# Altium PCB WIZ750SR.PcbDoc (part 2 of 2)
Units mm, origin at the board's own origin, x right, y up, seen from the top; angles counter-clockwise.
Board outline 45 x 30 mm, 4 copper layers (Top Layer, Internal Plane 1, Internal Plane 2, Bottom Layer); 93 components, 69 nets, 325 pads, 127 vias.
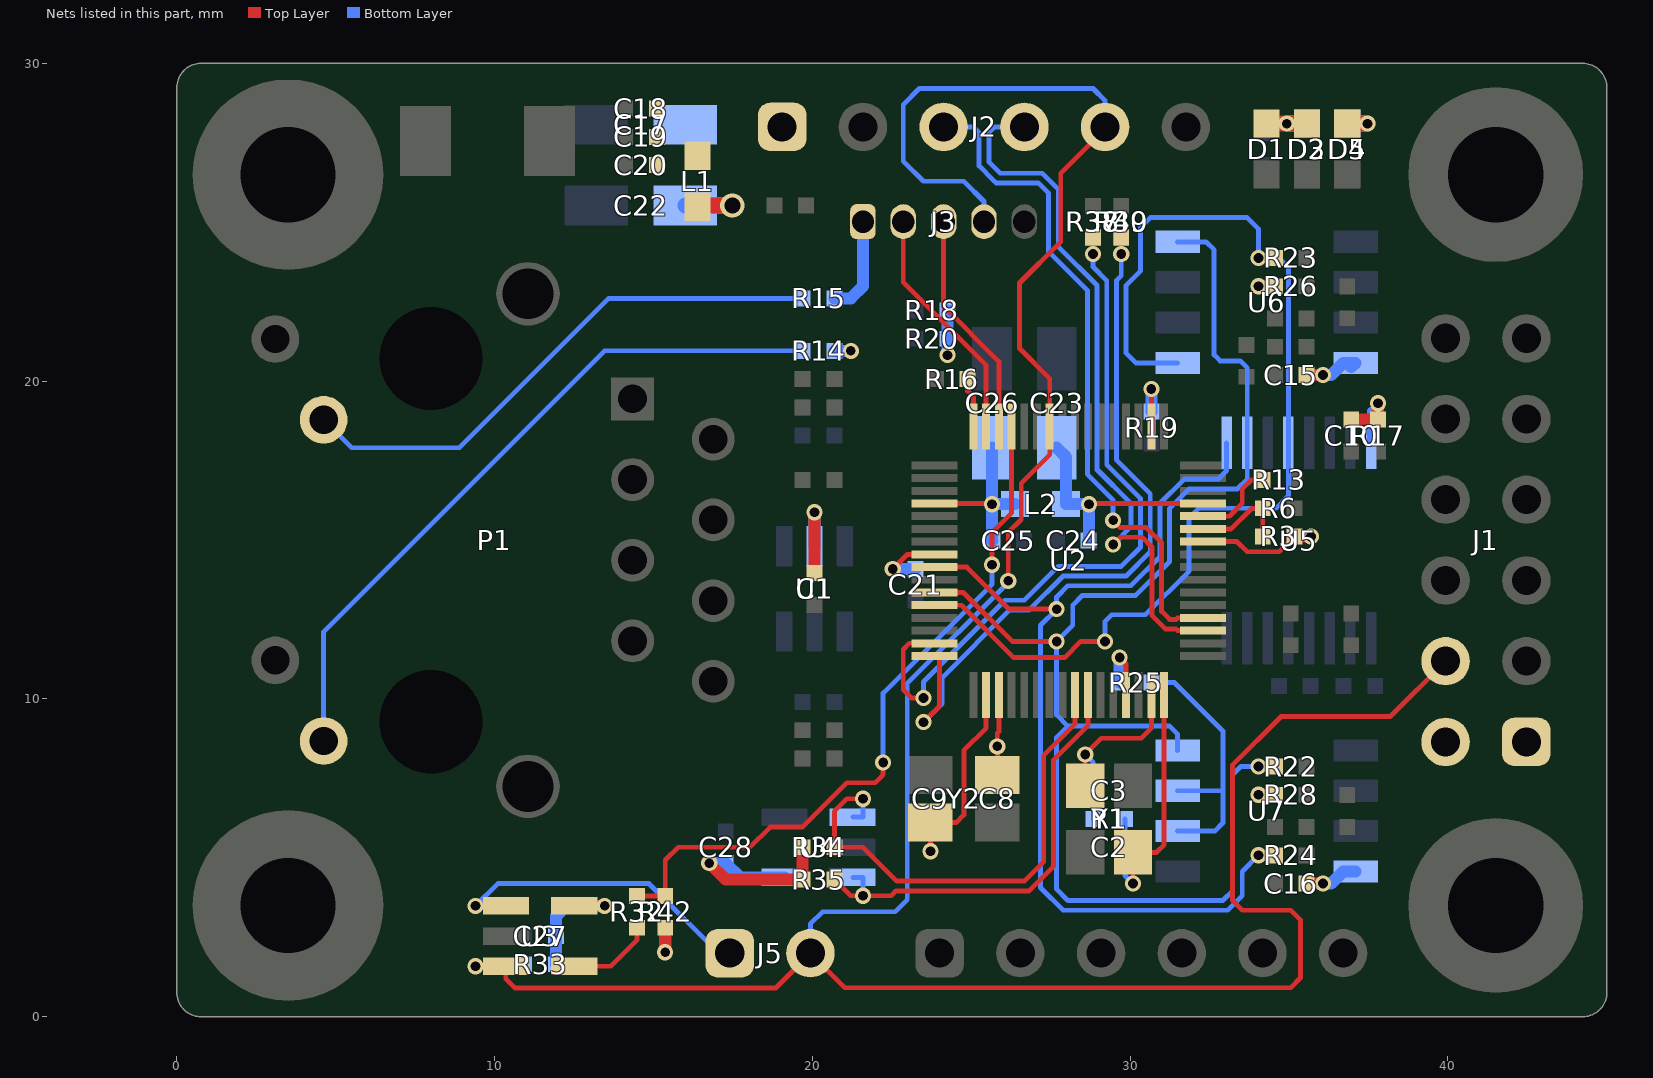
[diagram p4: the nets of this part, all layers, seen from the top]

## Via types
v1: diameter 0.508, hole 0.305, Top Layer to Bottom Layer, tented both sides, 92 vias
v2: diameter 0.762, hole 0.508, Top Layer to Bottom Layer, tented both sides, 35 vias

## Nets (pads, with @x,y where several pads share a name; then routed paths per layer and width w, separated by ;. In a path a pad name is that pad's centre, name@x,y a point inside that pad or via, vN(x,y) a via of type N, cw(c..) or ccw(c..) an arc to the next point about the centre after c; other vN are vias at no path point) (continued)
NetJ5_1: J5.1 U3.1 | length 10.2
  Top Layer w0.152: v1(9.398,3.49) U3.1@10.355,3.49
  Bottom Layer w0.152: v1(9.398,3.49) 10.099,4.191 14.224,4.191 14.859,4.191 17.05,2 J5.1@17.399,2
NetP1_L1: P1.L1 R14.2 | length 22.2
  Bottom Layer w0.152: P1.L1@4.62,8.675 4.62,12.113 13.462,20.955 R14.2@19.693,20.955
NetP1_L3: P1.L3 R15.2 | length 17.4
  Bottom Layer w0.152: P1.L3@4.62,18.785 5.498,17.907 8.89,17.907 13.589,22.606 R15.2@19.693,22.606
NetR13_2: R13.2 U2.12 | length 2.6
  Top Layer w0.152: U2.12@32.292,15.751 33.125,15.751 33.528,16.154 33.528,16.612 33.807,16.891 R13.2@34.171,16.891
NetR16_2: R16.2 U2.32 | length 1.6
  Top Layer w0.152: R16.2@24.884,20.066 24.884,19.693 25.067,19.51 U2.32@25.067,18.576
NetR25_1: R25.1 U7.2 U7.3 | length 8.7
  Bottom Layer w0.152: R25.1@30.675,10.516 31.394,10.516 32.918,8.992 32.918,7.112 ; U7.2@31.49,5.842 32.664,5.842 32.918,6.096 32.918,7.112 ; U7.3@31.49,7.112 32.918,7.112
NetR32_2: R32.2 U3.4 | length 2.9
  Top Layer w0.152: U3.4@12.645,1.45 U3.4@12.505,1.59 13.655,1.59 14.478,2.413 R32.2@14.478,2.802
REGIN: C23.1 C24.2 L2.1 U2.13 | length 7.4
  Top Layer w0.152: v1(28.702,16.129) 28.702,16.151 U2.13@32.292,16.151
  Bottom Layer w0.381: C23.1@27.686,17.904 27.978,17.612 L2.1@27.978,16.129 v1(28.702,16.129) 28.702,14.994 C24.2@28.694,14.986
REGOUT: C25.2 C26.1 L2.2 U2.36 | length 5.5
  Top Layer w0.152: U2.36@23.842,16.151 25.632,16.151 v1(25.654,16.129)
  Bottom Layer w0.381: C26.1@25.654,17.904 v1(25.654,16.129) ; C25.2@25.662,14.986 25.654,14.994 v1(25.654,16.129) ; L2.2@26.378,16.129 v1(25.654,16.129)
"RS232/485 SELECT PIN": R3.1 R6.2 U2.11 | length 3
  Top Layer w0.152: U2.11@32.292,15.351 33.182,15.351 33.833,16.002 R6.2@34.171,16.002 R3.1@34.171,15.113
RSTN: J1.4 J2.5 J3.4 J5.2 R33.1 U2.26 U3.3 | length 90.6
  Top Layer w0.152: v1(9.398,1.59) U3.3@10.355,1.59 10.35,1.585 10.35,1.2 10.65,0.9 18.839,0.9 J5.2@19.939,2 21.025,0.914 35.052,0.914 35.357,1.219 35.357,3.048 35.052,3.353 33.528,3.353 33.223,3.658 33.223,7.925 34.747,9.449 38.185,9.449 J1.4@39.926,11.19 ; v1(26.162,13.716) 26.162,15.24 26.569,15.647 26.569,16.79 27.467,17.688 U2.26@27.467,18.576 27.467,20.082 26.518,21.031 26.518,23.089 27.813,24.384 27.813,26.543 29.21,27.94 J2.5@29.21,28
  Bottom Layer w0.152: v1(9.398,1.59) 10.869,1.59 R33.1@10.93,1.651 ; J5.2@19.939,2 19.939,2.921 20.32,3.302 22.606,3.302 22.987,3.683 22.987,10.49 26.162,13.665 v1(26.162,13.716) ; J3.4@25.4,25.019 25.4,25.654 24.765,26.289 23.495,26.289 22.86,26.924 22.86,28.702 23.368,29.21 28.829,29.21 29.21,28.829 J2.5@29.21,28
RXD_RO: R23.2 U2.44 U5.12 U6.1 | length 34.8
  Top Layer w0.152: U2.44@23.842,12.951 24.692,12.951 26.34,11.303 27.94,11.303 28.448,11.811 v1(29.21,11.811) ; v1(34.036,23.876) R23.2@34.552,23.876
  Bottom Layer w0.152: v1(29.21,11.811) 29.21,12.446 29.413,12.649 30.48,12.649 31.852,14.021 31.852,15.697 32.156,16.002 34.595,16.002 34.981,16.388 U5.12@34.981,18.06 34.981,23.566 34.671,23.876 v1(34.036,23.876) 34.036,24.79 33.68,25.146 30.632,25.146 30.328,24.841 30.328,23.47 29.87,23.012 29.87,20.879 30.175,20.574 U6.1@31.49,20.574
SCL1: R34.1 U2.57 U4.1 | length 16
  Top Layer w0.152: v1(21.59,6.858) 21.082,6.858 20.693,6.469 R34.1@20.693,5.334 21.59,5.334 22.657,4.267 26.67,4.267 27.28,4.877 27.28,8.23 28.267,9.217 U2.57@28.267,10.126
  Bottom Layer w0.152: U4.1@21.268,6.284 21.59,6.284 v1(21.59,6.858)
SDA1: R35.1 U2.58 U4.3 | length 14.3
  Top Layer w0.152: R35.1@20.759,4.384 R35.1@20.693,4.318 21.201,3.81 v1(21.59,3.81) 22.479,3.81 22.631,3.962 26.822,3.962 27.584,4.724 27.584,8.077 28.667,9.16 U2.58@28.667,10.126
  Bottom Layer w0.152: U4.3@21.268,4.384 21.59,4.384 v1(21.59,3.81)
STATUS_LED0: R37.2 R38.2 U2.47 | length 23
  Top Layer w0.152: v1(23.495,10.033) 23.114,10.033 22.86,10.287 22.86,11.557 23.054,11.751 U2.47@23.842,11.751 ; v1(28.829,24.003) R37.2@28.829,24.519
  Bottom Layer w0.152: v1(23.495,10.033) 23.495,10.541 26.06,13.106 26.67,13.106 27.737,14.173 29.718,14.173 30.328,14.783 30.328,16.307 29.261,17.374 29.261,23.165 28.829,23.597 v1(28.829,24.003) R38.2@28.829,24.519
STATUS_LED1: R39.2 R40.2 U2.48 | length 23.2
  Top Layer w0.152: v1(23.495,9.271) 24.003,9.779 24.003,11.351 U2.48@23.842,11.351 ; v1(29.718,24.003) R39.2@29.718,24.519
  Bottom Layer w0.152: v1(23.495,9.271) 24.079,9.855 24.079,10.668 26.213,12.802 26.822,12.802 27.889,13.868 29.87,13.868 30.632,14.63 30.632,16.459 29.566,17.526 29.566,23.165 29.718,23.317 v1(29.718,24.003) R40.2@29.718,24.519
SWCLK: J3.3 U2.30 | length 7.2
  Top Layer w0.152: J3.3@24.13,25.019 24.13,22.352 25.867,20.615 U2.30@25.867,18.576
SWDIO: J3.2 U2.31 | length 7.5
  Top Layer w0.152: J3.2@22.86,25.019 22.86,23.114 25.467,20.507 U2.31@25.467,18.576
TXD_DI: R22.2 U2.43 U5.10 U6.4 U7.4 | length 46.3
  Top Layer w0.152: U2.43@23.842,13.351 24.749,13.351 26.289,11.811 v1(27.686,11.811) ; v1(34.036,7.874) R22.2@34.552,7.874
  Bottom Layer w0.152: U7.4@31.49,8.382 31.49,8.896 31.242,9.144 28.042,9.144 ; U6.4@31.49,24.384 32.385,24.384 32.639,24.13 32.639,20.828 32.829,20.637 33.465,20.637 33.681,20.421 U5.10@33.681,18.06 33.681,16.917 33.376,16.612 31.852,16.612 31.242,16.002 31.242,14.326 30.175,13.259 28.499,13.259 28.194,12.954 28.194,12.319 v1(27.686,11.811) 27.686,9.5 28.042,9.144 ; v1(34.036,7.874) 33.477,7.874 33.223,7.62 33.223,3.962 32.918,3.658 28.042,3.658 27.686,4.013 27.686,8.788 28.042,9.144
U_CTS0: R24.2 U2.41 U5.9 | length 31.4
  Top Layer w0.152: U2.41@23.842,14.151 24.863,14.151 26.187,12.827 v1(27.686,12.827) ; v1(34.036,5.08) R24.2@34.552,5.08
  Bottom Layer w0.152: U5.9@33.031,18.06 33.031,17.181 32.766,16.916 31.699,16.916 30.937,16.154 30.937,14.478 30.023,13.564 28.042,13.564 27.686,13.208 v1(27.686,12.827) 27.178,12.319 27.178,4.064 27.889,3.353 33.071,3.353 33.528,3.81 33.528,4.572 v1(34.036,5.08)
U_RXD2: J2.3 U2.4 | length 21.3
  Top Layer w0.152: v1(29.464,15.621) 29.693,15.392 30.505,15.392 30.988,14.909 30.988,12.757 31.242,12.503 31.443,12.503 31.491,12.551 U2.4@32.292,12.551
  Bottom Layer w0.152: J2.3@24.13,28 25.061,28 25.248,27.813 25.248,26.772 25.692,26.327 25.782,26.238 27.102,26.238 27.432,25.908 27.432,24.079 28.651,22.86 28.651,17.069 29.464,16.256 v1(29.464,15.621)
U_TXD2: J2.4 U2.3 | length 22.4
  Top Layer w0.152: v1(29.464,14.859) 29.693,15.088 30.378,15.088 30.683,14.783 30.683,12.631 31.116,12.199 31.443,12.199 31.491,12.151 U2.3@32.292,12.151
  Bottom Layer w0.152: J2.4@26.67,28 25.739,28 25.552,27.813 25.552,26.899 25.908,26.543 27.228,26.543 27.737,26.034 27.737,24.232 28.956,23.012 28.956,17.221 30.023,16.154 30.023,15.418 v1(29.464,14.859)
VDD_3.3A: C21.2 C22.1 L1.2 U2.40 | length 4.8
  Top Layer w0.152: v1(22.53,14.089) 22.992,14.551 U2.40@23.842,14.551
  Top Layer w0.508: L1.2@16.383,25.489 16.421,25.527 v2(17.481,25.527)
  Bottom Layer w0.381: v1(22.53,14.089) C21.2@23.241,14.089
  Bottom Layer w0.508: C22.1@16.005,25.527 v2(17.481,25.527)
VDD_3.3V: C1.2 C10.2 C15.2 C16.2 C17.1 C18.2 C19.2 C20.2 C27.2 C28.2 D1.1 D2.1 D3.1 D4.1 D5.1 J1.1 J1.2 J2.1 J3.1 L1.1 R3.2 R14.1 R15.1 R17.1 R18.2 R19.2 R20.2 R25.2 R26.1 R28.1 R33.2 R34.2 R35.2 R42.1 U1.5 U2.10 U2.18 U2.61 U3.5 U4.4 U5.16 U6.8 U7.8 | length 37.4
  Top Layer w0.152: v1(29.667,11.303) 29.867,11.103 U2.61@29.867,10.126 ; U2.18@30.667,18.576 v1(30.667,19.753) ; U2.10@32.292,14.951 33.36,14.951 33.68,14.63 34.688,14.63 R3.2@35.171,15.113
  Top Layer w0.381: U3.5@12.505,3.49 v1(13.462,3.49) ; v1(15.367,2.032) 15.371,2.036 R42.1@15.371,2.802 ; v1(16.756,4.834) 17.272,4.318 R35.2@19.693,4.318 R34.2@19.693,5.334 ; C1.2@20.066,13.962 v1(20.066,15.875) ; v1(34.036,6.985) R28.1@34.552,6.985 ; v1(34.036,22.987) R26.1@34.552,22.987 ; R3.2@35.171,15.113 v1(35.687,15.113) ; C16.2@35.552,4.191 v1(36.068,4.191) ; C15.2@35.552,20.193 v1(36.068,20.193) ; C10.2@36.957,18.788 R17.1@37.795,18.788 v1(37.795,19.304)
  Top Layer w0.508: D1.1@34.29,28.105 v1(34.925,28.105) D2.1@35.56,28.105 ; D4.1@36.83,28.105 v1(37.465,28.105)
  Bottom Layer w0.254: U5.16@37.581,18.06 37.581,19.061
  Bottom Layer w0.381: R33.2@11.93,1.651 C27.2@11.93,2.54 11.93,3.167 12.253,3.49 v1(13.462,3.49) ; v1(16.756,4.834) C28.2@17.272,4.834 17.722,4.384 U4.4@19.118,4.384 ; U1.5@20.066,14.802 v1(20.066,15.875) ; R14.1@20.693,20.955 v1(21.209,20.955) ; R15.1@20.693,22.606 21.209,22.606 21.59,22.987 J3.1@21.59,25.019 ; v1(24.249,20.82) R20.2@24.249,21.336 R18.2@24.249,22.225 ; R25.2@29.667,10.524 v1(29.667,11.303) ; R19.2@30.67,19.042 v1@30.67,19.75 ; v1(36.068,4.191) 36.322,4.191 36.703,4.572 U7.8@37.09,4.572 ; v1(36.068,20.193) 36.322,20.193 36.703,20.574 U6.8@37.09,20.574 U6.8@36.957,20.441
  Bottom Layer w0.508: v1(34.925,28.105) D3.1@35.56,28.105 ; D5.1@36.83,28.105 v1(37.465,28.105)
WDI: R32.1 R42.2 U2.29 | length 22.6
  Top Layer w0.152: R32.1@14.478,3.802 R42.2@15.371,3.802 15.371,4.933 15.772,5.334 18.034,5.334 18.669,5.969 19.685,5.969 21.082,7.366 21.971,7.366 22.225,7.62 v1(22.225,8.001) ; v1(25.654,14.224) 25.654,15.24 26.267,15.853 U2.29@26.267,18.576
  Bottom Layer w0.152: v1(22.225,8.001) 22.225,10.185 25.654,13.614 v1(25.654,14.224)
X1: C9.2 U2.50 Y2.3 | length 7.3
  Top Layer w0.152: v1(23.715,5.207) Y2.3@23.715,6.108 24.523,6.108 24.765,6.35 24.765,8.382 25.467,9.084 U2.50@25.467,10.126
  Bottom Layer w0.152: v1(23.715,5.207) C9.2@23.715,6.358
X2: C8.2 U2.51 Y2.1 | length 3.7
  Top Layer w0.152: Y2.1@25.815,7.608 v1(25.815,8.509) 25.815,8.924 25.867,8.976 U2.51@25.867,10.126
  Bottom Layer w0.152: C8.2@25.815,7.358 v1(25.815,8.509)
XIN: C3.2 R1.2 U2.63 Y1.3 | length 6.6
  Top Layer w0.152: Y1.3@28.587,7.273 v1(28.587,8.255) 29.095,8.763 30.353,8.763 30.667,9.077 U2.63@30.667,10.126
  Bottom Layer w0.152: v1(28.587,8.255) 28.837,8.005 C3.2@28.837,7.112 R1.2@28.837,6.223
XOUT: C2.2 R1.1 U2.64 Y1.1 | length 8.9
  Top Layer w0.152: v1(30.087,4.191) Y1.1@30.087,5.173 30.827,5.173 31.067,5.413 U2.64@31.067,10.126
  Bottom Layer w0.152: R1.1@29.837,6.223 C2.2@29.837,5.334 29.837,4.441 v1(30.087,4.191)
pads on no net: P1. P1.R4 P1.R5 P1.R6 U2.8 U2.19 U2.20 U2.21 U2.22 U2.27 U2.45 U2.46 U2.53 U2.54 U2.55 U2.56 U2.59 U2.60 U7.1
copper on no net:
  other v2: 41.5,1.417 40.027,2.027 42.973,2.027 39.417,3.5 43.583,3.5 40.027,4.973 42.973,4.973 41.5,5.583 41.5,24.417 40.027,25.027 42.973,25.027 39.417,26.5 43.583,26.5 40.027,27.973 42.973,27.973 41.5,28.583

## Polygon pours and split planes (outlines as drawn)
VDD_3.3V on Top Layer "Top Layer-net" (solid, remove dead copper, pour order 2): 14.859,26.543 19.812,26.543 20.066,26.797 20.066,29.21 19.812,29.464 19.05,29.464 15.113,29.464 14.859,29.21 14.859,26.543
CH_GND on Top Layer "Top Layer-net" (solid, remove dead copper, pour order 12): 0.762,29.591 0.381,29.21 0.381,27.432 0.381,0.762 0.762,0.381 2.413,0.381 6.198,0.381 6.604,0.787 6.604,1.143 6.604,5.588 6.985,5.969 8.128,5.969 11.938,5.969 12.192,6.223 12.192,23.749 11.938,24.003 9.017,24.003 8.636,24.384 8.636,29.058 8.103,29.591
GND on Top Layer "Top Layer-gnd" (solid, remove dead copper, pour order 16): 11.176,29.591 10.922,29.337 10.922,28.448 10.922,25.527 11.176,25.273 11.811,25.273 12.827,25.273 13.462,24.638 14.605,23.495 18.288,23.495 19.177,23.495 19.431,23.241 19.431,22.987 19.431,6.731 19.177,6.477 18.415,6.477 14.605,6.477 12.954,4.826 8.763,4.826 8.509,4.572 8.509,4.318 8.509,0.635 8.763,0.381 9.652,0.381 37.211,0.381 37.465,0.635 37.465,0.889 37.465,5.461 39.243,7.239 39.624,7.62 42.799,7.62 44.323,7.62 44.577,7.874 44.577,8.509 44.577,22.098 44.323,22.352 44.069,22.352 39.624,22.352 37.465,24.511 37.465,28.575 37.465,29.337 37.211,29.591
GND on Bottom Layer "Top Layer-gnd" (solid, remove dead copper, pour order 22): 11.049,29.464 10.922,29.337 10.922,28.448 10.922,25.527 11.176,25.273 11.811,25.273 12.827,25.273 13.462,24.638 14.605,23.495 18.288,23.495 19.177,23.495 19.431,23.241 19.431,22.987 19.431,6.731 19.177,6.477 18.415,6.477 14.605,6.477 12.827,4.699 8.636,4.699 8.509,4.572 8.509,4.318 8.509,0.635 8.763,0.381 9.652,0.381 37.211,0.381 37.465,0.635 37.465,0.889 37.465,5.461 39.243,7.239 39.624,7.62 42.799,7.62 44.323,7.62 44.577,7.874 44.577,8.509 44.577,22.098 44.323,22.352 44.069,22.352 39.624,22.352 37.465,24.511 37.465,28.575 37.465,29.337 37.338,29.464
CH_GND on Bottom Layer "Top Layer-net" (solid, remove dead copper, pour order 20): 0.762,29.591 0.381,29.21 0.381,27.432 0.381,0.762 0.762,0.381 2.413,0.381 6.198,0.381 6.604,0.787 6.604,1.143 6.604,5.588 6.985,5.969 8.128,5.969 11.938,5.969 12.192,6.223 12.192,23.749 11.938,24.003 9.017,24.003 8.636,24.384 8.636,29.058 8.103,29.591
VDD_3.3V on Bottom Layer "Top Layer-net" (solid, remove dead copper, pour order 6): 16.256,28.829 15.113,28.829 14.859,28.575 14.859,27.559 14.859,27.305 15.113,27.051 16.002,27.051 19.812,27.051 20.066,27.305 20.066,28.575 19.812,28.829
GND on Internal Plane 1 (split plane): 44.304,29.483 44.365,29.458 44.417,29.417 44.458,29.365 44.483,29.304 44.49,29.247 44.49,29.238 44.49,24.044 44.133,23.687 40.212,23.687 38.673,25.226 38.673,29.207 38.956,29.49 44.238,29.49 44.247,29.49
CH_GND on Internal Plane 1 (split plane): 44.49,6.157 44.49,0.762 44.49,0.753 44.483,0.696 44.458,0.635 44.417,0.583 44.365,0.542 44.304,0.517 44.247,0.51 44.238,0.51 38.953,0.51 38.673,0.791 38.673,4.746 40.339,6.412 44.235,6.412
GND on Internal Plane 1 (split plane): 38.289,29.209 38.289,25.146 38.295,25.096 38.307,25.069 38.315,25.05 38.345,25.01 39.996,23.359 40.036,23.329 40.082,23.309 40.132,23.303 44.133,23.303 44.49,22.946 44.49,7.051 44.235,6.796 40.259,6.796 40.209,6.79 40.163,6.77 40.123,6.74 38.345,4.962 38.315,4.922 38.307,4.903 38.295,4.876 38.289,4.826 38.289,0.889 38.289,0.791 38.009,0.51 8.56,0.51 8.56,4.496 8.738,4.674 12.802,4.674 14.173,6.045 14.605,6.477 18.745,6.477 18.745,22.86 15.215,22.86 12.802,25.273 12.273,25.273 11.125,25.273 10.82,25.578 10.82,29.489 9.441,29.489 9.441,29.49 38.009,29.49
CH_GND on Internal Plane 1 (split plane): 0.762,29.49 8.341,29.49 8.558,29.273 8.636,29.195 8.636,25.527 8.637,25.273 8.636,24.383 9.017,24.003 11.938,24.003 12.192,23.749 12.191,6.298 11.862,5.969 6.909,5.969 6.553,5.613 6.553,0.678 6.386,0.51 0.762,0.51 0.753,0.51 0.696,0.517 0.635,0.542 0.583,0.583 0.542,0.635 0.517,0.696 0.51,0.753 0.51,0.762 0.51,29.238 0.51,29.247 0.517,29.304 0.542,29.365 0.583,29.417 0.635,29.458 0.696,29.483 0.753,29.49
VDD_3.3V on Internal Plane 2 (split plane): 44.304,29.483 44.365,29.458 44.417,29.417 44.458,29.365 44.483,29.304 44.49,29.247 44.49,29.238 44.49,24.035 44.142,23.687 40.212,23.687 38.673,25.226 38.673,29.209 38.953,29.49 44.238,29.49 44.247,29.49
VDD_3.3A on Internal Plane 2 (split plane): 14.489,29.311 14.489,26.645 14.496,26.595 14.507,26.568 14.515,26.549 14.545,26.509 14.825,26.229 14.865,26.199 14.911,26.18 14.961,26.173 20.237,26.173 20.509,25.901 20.509,17.174 20.418,17.083 19.939,17.083 19.889,17.077 19.843,17.057 19.803,17.027 19.549,16.773 19.519,16.733 19.511,16.714 19.499,16.687 19.493,16.637 19.493,15.037 19.499,14.987 19.511,14.96 19.519,14.941 19.549,14.901 19.854,14.596 19.894,14.566 19.913,14.558 19.94,14.546 19.99,14.54 23.034,14.54 23.176,14.398 23.176,12.754 23.06,12.638 18.72,12.638 18.72,18.009 19.406,18.009 19.406,20.345 18.72,20.345 18.72,22.835 15.24,22.835 12.802,25.273 12.273,25.273 11.125,25.273 10.82,25.578 10.82,29.489 9.441,29.489 9.441,29.49 14.31,29.49
CH_GND on Internal Plane 2 (split plane): 44.49,6.14 44.49,0.762 44.49,0.753 44.483,0.696 44.458,0.635 44.417,0.583 44.365,0.542 44.304,0.517 44.247,0.51 44.238,0.51 38.953,0.51 38.673,0.791 38.673,4.746 40.339,6.412 44.218,6.412
VDD_3.3V on Internal Plane 2 (split plane): 38.289,29.207 38.289,25.146 38.295,25.096 38.307,25.069 38.315,25.05 38.345,25.01 39.996,23.359 40.036,23.329 40.082,23.309 40.132,23.303 44.133,23.303 44.49,22.946 44.49,7.051 44.235,6.796 40.259,6.796 40.209,6.79 40.163,6.77 40.123,6.74 38.345,4.962 38.315,4.922 38.307,4.903 38.295,4.876 38.289,4.826 38.289,0.791 38.009,0.51 8.56,0.51 8.56,4.496 8.738,4.674 12.802,4.674 14.173,6.045 14.605,6.477 18.72,6.477 18.72,12.254 23.139,12.254 23.189,12.26 23.216,12.272 23.235,12.28 23.275,12.31 23.504,12.539 23.534,12.579 23.554,12.625 23.56,12.675 23.56,14.478 23.554,14.528 23.534,14.574 23.504,14.614 23.25,14.868 23.21,14.898 23.191,14.906 23.164,14.918 23.114,14.924 20.069,14.924 19.877,15.116 19.877,16.557 20.019,16.699 20.498,16.699 20.548,16.705 20.575,16.717 20.594,16.725 20.634,16.755 20.837,16.958 20.867,16.998 20.887,17.044 20.893,17.094 20.893,25.981 20.887,26.031 20.875,26.058 20.867,26.077 20.837,26.117 20.453,26.501 20.413,26.532 20.394,26.54 20.366,26.551 20.317,26.557 15.04,26.557 14.873,26.724 14.873,29.308 15.055,29.49 38.006,29.49
CH_GND on Internal Plane 2 (split plane): 0.762,29.49 8.341,29.49 8.509,29.322 8.636,29.195 8.636,25.527 8.637,25.273 8.636,24.383 9.017,24.003 11.938,24.003 12.192,23.749 12.191,6.298 11.862,5.969 6.909,5.969 6.553,5.613 6.553,0.678 6.386,0.51 0.762,0.51 0.753,0.51 0.696,0.517 0.635,0.542 0.583,0.583 0.542,0.635 0.517,0.696 0.51,0.753 0.51,0.762 0.51,29.238 0.51,29.247 0.517,29.304 0.542,29.365 0.583,29.417 0.635,29.458 0.696,29.483 0.753,29.49

## Keep-outs
Keep-Out Layer:
  the board outline again, w0.127
  text ".Layer_Name" at 9.398,31.75 h1.52

## Other copper
Top Layer:
  pour cut-out: 42.164,12.141 42.164,12.725 42.367,12.725 42.367,12.141
  pour cut-out: 40.843,13.31 41.097,13.564 41.3,13.564 41.554,13.31 41.554,14.173 40.843,14.173
  pour cut-out: 12.191,6.298 12.192,23.749 11.938,24.003 9.017,24.003 8.636,24.383 8.637,25.273 8.636,25.527 8.636,29.489 10.82,29.489 10.82,25.578 11.125,25.273 12.273,25.273 12.802,25.273 15.215,22.86 18.745,22.86 18.745,6.477 14.605,6.477 14.173,6.045 12.802,4.674 8.738,4.674 8.56,4.496 8.56,0.483 6.553,0.483 6.553,5.613 6.909,5.969 11.862,5.969
  pour cut-out: 14.63,29.206 14.122,29.206 14.227,29.31 14.227,29.461 13.997,29.691 13.741,29.691 13.741,30 14.63,30
  pour cut-out: 18.161,6.477 18.39,6.477 18.39,6.121 18.161,6.121 18.263,6.223 18.263,6.375
  pour cut-out: 10.033,1.016 10.312,1.016 10.312,0.381 10.033,0.381 10.033,0.432 10.109,0.508 10.109,0.711 10.033,0.787
  pour cut-out: 14.681,4.394 14.935,4.648 14.935,4.394
  pour cut-out: 22.784,17.475 22.631,17.628 22.784,17.628
  pour cut-out: 21.272,18.567 21.45,18.567 21.806,18.567 21.806,18.237 21.667,18.237 21.632,18.272 21.632,18.449 21.552,18.53 21.32,18.53
  pour cut-out: 21.996,8.966 22.225,8.966 22.327,8.865 22.708,8.865 22.809,8.966 22.809,9.677 22.657,9.83 22.809,9.83 23.05,9.83 23.05,9.207 23.393,8.865 23.393,8.458 21.996,8.458
  text ".Layer_Name" at 9.398,31.75 h1.52
Bottom Layer:
  pour cut-out: 22.047,16.358 22.098,16.358 22.327,16.586 21.869,17.221 21.717,17.069 21.361,17.069
  pour cut-out: 24.181,13.056 24.181,16.866 23.444,17.602 23.444,18.339 23.216,18.11 23.012,18.11 22.835,18.288 22.835,18.009 22.835,17.45 23.698,16.586 23.673,16.561 23.673,15.545 22.962,14.834 22.962,14.63 23.825,14.63 23.825,13.056
  pour cut-out: 12.191,6.298 12.192,23.749 11.938,24.003 9.017,24.003 8.636,24.383 8.637,25.273 8.636,25.527 8.636,29.489 10.82,29.489 10.82,25.578 11.125,25.273 12.273,25.273 12.802,25.273 15.215,22.86 18.745,22.86 18.745,6.477 14.605,6.477 14.173,6.045 12.802,4.674 8.738,4.674 8.56,4.496 8.56,0.483 6.553,0.483 6.553,5.613 6.909,5.969 11.862,5.969
  pour cut-out: 21.692,20.371 22.098,20.371 21.869,20.599 21.869,20.752 21.869,20.98 22.073,21.184 21.692,21.184
  pour cut-out: 22.504,21.158 22.657,21.006 22.657,21.158
  pour cut-out: 32.537,17.526 32.334,17.323 32.537,17.323
  pour cut-out: 33.267,19.402 33.064,19.199 33.267,19.199
  text ".Layer_Name" at 9.398,31.75 h1.52
Internal Plane 1 (plane layer: these items are gaps in the copper):
  pour cut-out: 12.191,6.298 12.192,23.749 11.938,24.003 9.017,24.003 8.636,24.383 8.637,25.273 8.636,25.527 8.636,29.489 10.82,29.489 10.82,25.578 11.125,25.273 12.273,25.273 12.802,25.273 15.215,22.86 18.745,22.86 18.745,6.477 14.605,6.477 14.173,6.045 12.802,4.674 8.738,4.674 8.56,4.496 8.56,0.483 6.553,0.483 6.553,5.613 6.909,5.969 11.862,5.969
  lines w0.381: 6.147,0 6.833,0.686 6.858,0.686 ; 7.544,0 6.858,0.686 ; 8.103,29.997 8.105,29.997 8.301,29.801 8.694,29.409 8.89,29.213 ; 8.891,29.483 9.163,29.483 ; 9.68,30 8.89,29.21 8.89,24.638 9.271,24.257 12.04,24.257 12.446,23.851 12.446,6.096 12.065,5.715 7.214,5.715 6.858,5.359 6.858,0.686 ; 37.77,0 38.481,0.711 ; 37.821,30 37.821,29.949 38.481,29.289 38.481,29.314 ; 38.481,0 38.481,0.889 ; 39.192,0 38.481,0.711 ; 39.192,29.997 38.481,29.286 38.481,25.146 40.132,23.495 44.213,23.495 ; 45,6.604 44.314,6.604 ; 45,7.29 44.314,6.604 ; 45,22.708 44.213,23.495 ; 45,23.495 44.213,23.495 ; 45,24.282 44.213,23.495 ; 45.004,5.914 44.314,6.604 ; 38.481,0.711 38.481,4.826 40.259,6.604 44.314,6.604
  text "GND" at 9.398,31.782 h1.52
Internal Plane 2 (plane layer: these items are gaps in the copper):
  pour cut-out: 18.694,18.009 19.406,18.009 19.406,20.345 18.694,20.345
  pour cut-out: 12.191,6.298 12.192,23.749 11.938,24.003 9.017,24.003 8.636,24.383 8.637,25.273 8.636,25.527 8.636,29.489 10.82,29.489 10.82,25.578 11.125,25.273 12.273,25.273 12.802,25.273 15.24,22.835 18.72,22.835 18.72,6.477 14.605,6.477 14.173,6.045 12.802,4.674 8.738,4.674 8.56,4.496 8.56,0.483 6.553,0.483 6.553,5.613 6.909,5.969 11.862,5.969
  lines w0.381: 6.248,0.102 6.833,0.686 6.858,0.686 ; 7.544,0 6.858,0.686 ; 9.169,29.489 9.138,29.458 8.645,29.458 8.103,30 8.89,29.213 ; 14.072,30 14.681,29.39 14.681,29.388 ; 15.596,30 15.293,30 14.681,29.388 ; 18.415,12.446 23.139,12.446 23.368,12.675 23.368,14.478 23.114,14.732 19.99,14.732 19.685,15.037 19.685,16.637 19.939,16.891 20.498,16.891 20.701,17.094 20.701,25.981 20.317,26.365 14.961,26.365 14.681,26.645 14.681,29.388 ; 38.481,0 37.77,0 38.481,0.711 ; 38.481,30.013 38.783,30.013 ; 39.192,0 38.481,0.711 ; 39.192,30 38.481,29.289 38.481,29.286 ; 44.975,23.495 44.221,23.495 ; 45,6.604 45,7.29 44.314,6.604 44.298,6.604 ; 45,22.708 44.213,23.495 ; 45.004,5.897 44.298,6.604 ; 45.004,24.278 44.221,23.495 ; 6.858,0.686 6.858,5.359 7.214,5.715 12.065,5.715 12.446,6.096 12.446,23.851 12.04,24.257 9.271,24.257 8.89,24.638 8.89,29.21 ; 8.89,29.21 9.68,30 37.767,30 38.481,29.286 ; 8.89,29.21 8.89,29.213 ; 8.89,29.21 8.89,29.213 ; 38.481,0.711 38.481,4.826 40.259,6.604 44.298,6.604 ; 38.481,29.286 38.481,25.146 40.132,23.495 44.213,23.495 ; 44.213,23.495 44.221,23.495
  text "POWER" at 9.398,31.782 h1.52

## Silkscreen, mask and mechanical layers (free items; w line width, h text height)
Top Overlay:
  text ".Layer_Name" at 9.398,31.782 h1.52
  text "WIZ750SR Ver1.1" at 6.604,5.334 h1.52
Bottom Overlay:
  lines w0.203: 24.003,2 24.003,3.238 26.67,3.238 ; 28.829,3.238 31.623,3.238 31.623,2
  text ".Layer_Name" at 9.398,31.75 h1.52
  text "VDD" at 19.812,28.956 h0.64
  text "BOOT" at 22.606,28.956 h0.64
  text "RX" at 24.638,28.956 h0.64
  text "TX" at 27.178,28.956 h0.64
  text "nRST" at 30.226,28.956 h0.64
  text "GND" at 32.512,28.956 h0.64
  text "JTAG" at 25.253,25.961 h0.64
  text "GND" at 42.037,19.812 h0.64
  text "485_SEL" at 41.783,17.272 h0.64
  text "CTS" at 43.688,17.272 h0.64
  text "DSR" at 40.64,14.732 h0.64
  text "TXD" at 43.688,14.732 h0.64
  text "WIZ750SR" at 8.382,14.021 h1.52
  text "Ver1.1" at 8.407,12.954 h1.52
  text "DTR" at 40.64,12.192 h0.64
  text "RTS" at 43.688,12.192 h0.64
  text "nRESET" at 41.402,9.652 h0.64
  text "RXD" at 43.688,9.652 h0.64
  text "VDD" at 42.037,6.985 h0.64
  text "GPIO" at 28.639,2.921 h0.64
  text "WDT" at 19.939,0.381 h0.64
  text "D" at 24.194,0.381 h0.64
  text "C" at 26.733,0.381 h0.64
  text "B" at 29.273,0.381 h0.64
  text "A" at 31.813,0.381 h0.64
  text "A_Boot" at 35.56,0.381 h0.64
  text "GND" at 37.529,0.381 h0.64
Top Paste:
  text ".Layer_Name" at 9.398,31.75 h1.52
Bottom Paste:
  text ".Layer_Name" at 9.398,31.75 h1.52
Top Solder:
  text ".Layer_Name" at 9.398,31.75 h1.52
Bottom Solder:
  text ".Layer_Name" at 9.398,31.75 h1.52
Drill Guide:
  text ".Layer_Name" at 9.398,31.75 h1.52
Mechanical 2:
  lines w0.127: 51.892,12.065 78.054,12.065 ; 51.892,14.859 78.054,14.859 ; 0,0.762 ccw(c0.762,0.762) 0.762,0 44.238,0 ccw(c44.238,0.762) 45,0.762 45,29.238 ccw(c44.238,29.238) 44.238,30 0.762,30 ccw(c0.762,29.238) 0,29.238 0,0.762 ; 50.546,0.711 ccw(c51.257,0.711) 51.257,0 78.435,0 ccw(c78.435,0.711) 79.146,0.711 79.146,19.939 ccw(c78.435,19.939) 78.435,20.65 51.257,20.65 ccw(c51.257,19.939) 50.546,19.939 50.546,0.711
  text "BOARD NAME : WIZ750SR" at 0,42.926 h1.52
  text "VERSION : V1.1" at 0,40.132 h1.52
  text "SIZE : 45mmX30mmX1.6T" at 0,37.338 h1.52
  text "GERBER DATE : 2017.07.13" at 0,34.544 h1.52
  text "LAYER :" at 0,31.75 h1.52
  text "Layer Stack Up Detail for:" at 52.019,18.542 h1.02
  text "WIZ750SR V1.1.PcbDoc" at 51.892,16.129 h1.27
  text "Layer Name : 4L  1.6T" at 52.019,12.954 h1.02
  text "Top Layer" at 51.892,9.271 h1.52
  text "GND" at 51.892,6.477 h1.52
  text "POWER" at 51.892,3.81 h1.52
  text "Bottom Layer" at 51.892,1.27 h1.52
  text "KS-TECH artwork" at 50.495,-4.191 h5.08
Drill Drawing:
  text ".Layer_Name" at 9.398,31.75 h1.52
  text ".Legend" at 50.546,22.098 h1.02

## Dimensions
0,0.762 to 45,0.762 on Mechanical 2
0.762,0 to 0.762,30 on Mechanical 2

## Text inside footprints (layer, text, board x,y; h text height)
P1: Top Overlay "7" at 13.959,10.809 h0.76 r270; Top Overlay "8" at 16.499,9.539 h0.76 r270; Top Overlay "2" at 16.499,19.826 h0.76 r270; Top Overlay "1" at 13.959,20.842 h0.76 r270; Top Overlay "L1" at 2.651,8.763 h0.76 r270; Top Overlay "L2" at 2.651,10.287 h0.76 r270; Top Overlay "L3" at 2.651,18.669 h0.76 r270; Top Overlay "L4" at 2.651,20.32 h0.76 r270